# Allegro board P1_Munteanu_Alessia.brd
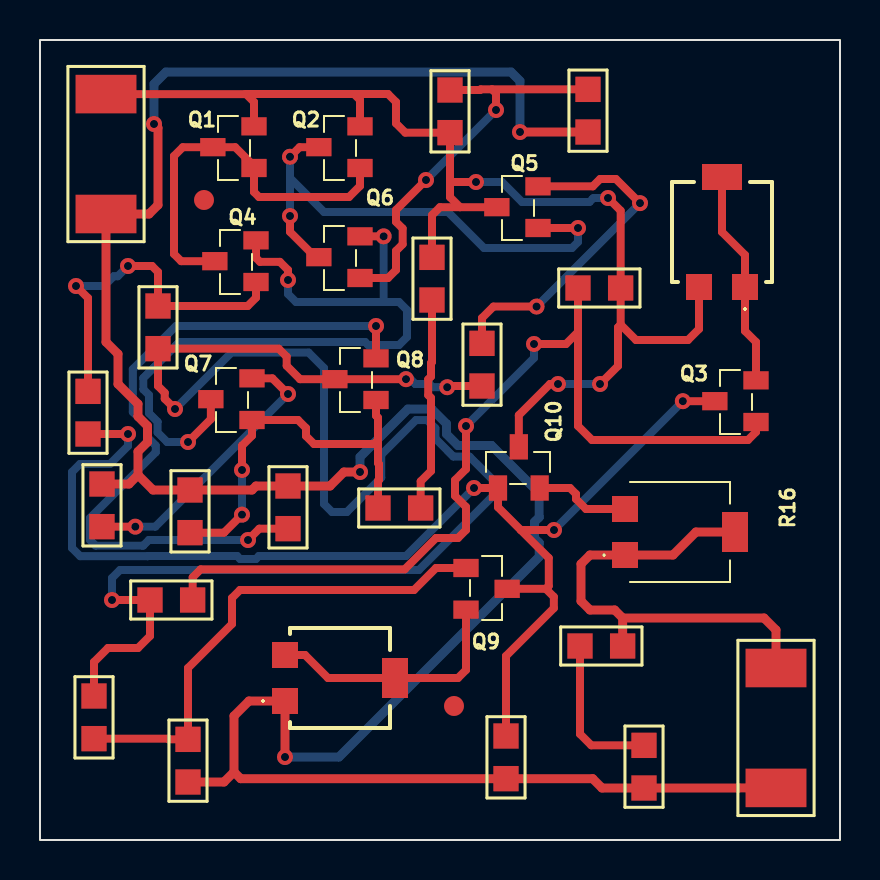
[diagram p0: board, top side]
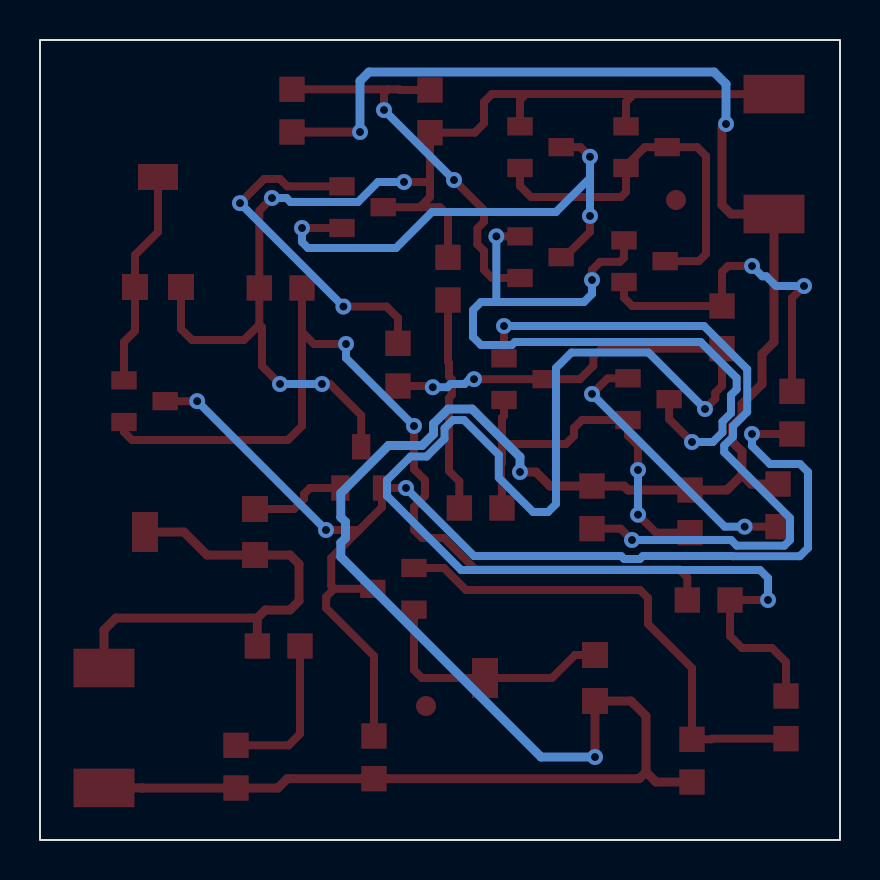
[diagram p1: board, bottom side, seen from below]

Outline 40 x 40 mm; copper layers: TOP, BOTTOM. Coordinates in mm from the lower left corner of the outline.
Outline path: rectangle 0,0 40,40

## Design rules (mm)
nets with their own width: min track width 0.4; nets N10233 N10271 N10283 N10319 N10427 N10509 N10569 N10663 N10703 N10707 N10767 N10953 N10981 N10985 N11935 N12231 N108211 N108411 VCC
nets with their own width: min track width 0.45; nets GND VOUT

## Placement (name value [footprint] x y rotation side)
C2  1n  [SMC0805]  23.3 5.2 270 top
J1  CON2  [SMR2512]  36.8 8.6 270 top
J2  CON2  [SMR2512]  3.3 31.3 90 top
NOREF  -  [unnamed]  8.2 32 0 top
NOREF#2  -  [unnamed]  20.7 6.7 0 top
Q1  PNP BCE  [TO236AA]  10.7 33.6 0 top
Q2  PNP BCE  [TO236AA]  16 33.6 0 top
Q3  PNP BCE  [TO236AA]  35.8 20.9 0 top
Q4  NPN BCE  [TO236AA]  10.8 27.9 0 top
Q5  NPN BCE  [TO236AA]  24.9 30.6 0 top
Q6  NPN BCE  [TO236AA]  16 28.1 0 top
Q7  NPN BCE  [TO236AA]  10.6 21 0 top
Q8  NPN BCE  [TO236AA]  16.8 22 0 top
Q9  NPN BCE  [TO236AA]  21.3 13.6 180 top
Q10  NPN BCE  [TO236AA]  22.9 17.6 270 top
R1  47k  [SMR0805]  5.9 26.7 270 top
R2  68k  [SMR0805]  2.4 20.3 90 top
R3  100  [SMR0805]  3.1 17.8 270 top
R4  15k  [SMR0805]  16.9 16.6 0 top
R5  15k  [SMR0805]  19.6 27 90 top
R6  2k  [SMR0805]  7.5 17.5 270 top
R7  2k  [SMR0805]  20.5 37.5 270 top
R8  2k  [SMR0805]  27.4 35.4 90 top
R9  510  [SMR0805]  22.1 22.7 90 top
R10  1k  [SMR0805]  12.4 17.7 270 top
R11  47k  [SMR0805]  5.5 12 0 top
R12  47k  [SMR0805]  2.7 7.2 270 top
R13  10k  [SMR0805]  26.9 27.6 0 top
R14  10k  [SMR0805]  7.4 2.9 90 top
R15  10k  [SMR0805]  27 9.7 0 top
R16  -  [TS53YL104MR10]  32 15.4 270 top
RSAR  1k  [SMR0805]  30.2 2.6 90 top
VR1  -  [TS53YL202MR10]  34.1 30.4 0 top
VR2  -  [TS53YL202MR10]  15 8.1 270 top

## Library data of the parts
C2 = C
J1 = CON2_1
J2 = CON2_0
Q1 = PNP BCE_0
Q2 = PNP BCE_1
Q3 = PNP BCE_2
Q4-Q10 = NPN BCE_0
R1-R15 RSAR = R
R16 = TS53YL104MR10
VR1 VR2 = TS53YL202MR10

## Footprints (pads in the part's own frame, mm; a bottom-side part is the same pattern mirrored in y, then rotated)
SMC0805
  rect 1.27x1.27 smd: 1(0,0) 2(2.134,0)
SMR0805
  rect 1.27x1.27 smd: 1(0,0) 2(2.134,0)
SMR2512
  rect 1.93x3.048 smd: 1(0,0) 2(5.994,0)
TO236AA
  rect 1.27x0.914 smd: 1(0,0) 2(0,2.083) 3(-2.057,1.041)
TS53YL104MR10
  rect 1.3x1.3 smd: A1(1.15,-2.75) C1(-1.15,-2.75)
  rect 2x1.3 smd: B1(0,2.75)
TS53YL202MR10
  rect 1.3x1.3 smd: A1(1.15,-2.75) C1(-1.15,-2.75)
  rect 2x1.3 smd: B1(0,2.75)
unnamed
  round 1 smd: (0,0)

## Nets
GND: C2.2 J1.2 J2.1 R3.1 R6.1 R8.1 R10.1 R14.1 RSAR.1 VR2.A1
VCC: J2.2 Q1.2(E) Q2.2(E) Q5.3 Q10.3 R5.2 R7.2 R13.2 VR1.C1
VOUT: J1.1 R15.2 R16.A1 R16.B1
N10233: Q3.1 R11.2 R13.1
N10271: Q8.3 R1.2 R9.1 R11.1 R12.1
N10283: C2.1 Q3.3 Q9.3 Q10.1 R2.1
N10319: Q4.1 R1.1 R2.2
N10427: Q9.1 R12.2 R14.2
N10509: Q1.1 Q1.3 Q2.1 Q4.3
N10569: Q2.3 Q5.1 Q6.3
N10663: Q5.2(E) R9.2
N10703: Q6.1 R7.1 R8.2
N10707: Q10.2(E) R16.C1
N10767: Q4.2(E) Q6.2(E) Q7.3
N10953: Q7.1 Q8.1 R4.1 R6.2
N10981: Q7.2(E) R3.2
N10985: Q8.2(E) R10.2
N11935: Q9.2(E) VR2.B1(WIPER) VR2.C1
N12231: Q3.2(E) VR1.A1 VR1.B1(WIPER)
N108211: R15.1 RSAR.2
N108411: R4.2 R5.1

## Via types
v1: diameter 0.8, hole 0.4, TOP to BOTTOM, 36 vias

## Routing (per net, layer and track width the routed paths; a pad name or vN(x,y) marks a point on that pad's centre or on a via; arc(x,y) is an arc through that point)
GND: length 132.9
  TOP w0.45: 9.7,3.4 10.03,3.07 C2.2 27.63,3.07 28.1,2.6 RSAR.1 34.92,2.6 34.92,2.61 J1.2 ; 9.7,3.4 9.7,6.2 10.45,6.95 VR2.A1 v1(12.25,4.15) ; 9.7,3.4 9.2,2.9 R14.1 ; 4.9,18.25 4.45,17.8 R3.1 ; 4.9,18.25 5.65,17.5 R6.1 10.6,17.5 10.8,17.7 R10.1 14.5,17.7 15.2,18.4 v1(16,18.4) ; 4.9,18.25 4.9,19.42 5.38,19.9 5.38,20.7 4.9,21.18 4.9,21.8 3.9,22.8 3.9,24.3 3.3,24.9 J2.1 5.45,31.3 5.9,31.75 5.9,35.6 v1(5.7,35.8) ; v1(24,35.4) R8.1
  BOTTOM w0.45: v1(5.7,35.8) 5.7,37.8 6.3,38.4 23.55,38.4 24,37.95 v1(24,35.4) ; v1(16,18.4) 16,19.15 18.4,21.55 19.59,21.55 20.32,20.81 20.32,20.3 20.9,19.73 22.57,19.73 24.96,17.34 24.96,16.14 24.73,15.9 24.73,15.1 24.96,14.86 24.96,14.16 14.95,4.15 v1(12.25,4.15)
VCC: length 62.8
  TOP w0.4: v1(28,22.8) 28.9,23.7 28.9,25.63 29.03,25.77 ; Q5.3 21,31.64 ; 21,31.64 20.5,32.14 20.5,32.9 ; 21,31.64 20,31.64 19.6,31.24 R5.2 ; 20.5,32.9 R7.2 18.27,35.37 17.8,35.83 17.8,36.9 17.4,37.3 15.7,37.3 ; 20.5,32.9 v1(21.8,32.9) ; 15.7,37.3 16,37 Q2.2 ; 15.7,37.3 10.31,37.3 10.31,37.29 ; v1(25.9,22.8) 25.5,22.8 23.94,21.24 Q10.3 ; 10.31,37.29 10.7,36.9 Q1.2 ; 10.31,37.29 J2.2 ; 29.03,25.77 29.8,25 32.4,25 32.95,25.55 VR1.C1 ; 29.03,25.77 R13.2 29.03,31.47 v1(28.4,32.1)
  BOTTOM w0.4: v1(21.8,32.9) 23.1,32.9 24.1,31.9 27.47,31.9 27.67,32.1 v1(28.4,32.1) ; v1(25.9,22.8) v1(28,22.8)
VOUT: length 23.9
  TOP w0.45: 29.13,11.1 36.2,11.1 36.8,10.5 J1.1 ; 29.13,11.1 R15.2 ; 29.13,11.1 28.73,11.5 27.5,11.5 27.05,11.95 27.05,13.8 27.5,14.25 R16.A1 31.65,14.25 32.8,15.4 R16.B1
N10233: length 46.1
  TOP w0.4: v1(24.7,24.8) 26.3,24.8 26.9,25.4 ; 26.9,25.4 26.9,20.7 27.6,20 35.4,20 35.8,20.4 Q3.1 ; 26.9,25.4 R13.1 ; v1(21.3,20.7) 21.3,18.54 20.75,17.99 20.75,17.21 21.3,16.66 21.3,15.5 20.9,15.1 19.8,15.1 18.23,13.53 8.03,13.53 7.63,13.13 R11.2
  BOTTOM w0.4: v1(21.3,20.7) 24.7,24.1 v1(24.7,24.8)
N10271: length 80.5
  TOP w0.4: v1(3.6,12) R11.1 5.5,10.2 4.9,9.6 3.4,9.6 2.7,8.9 R12.1 ; v1(6.75,21.55) 6.24,22.06 6.24,22.36 5.9,22.7 R1.2 11.93,24.57 12.33,24.17 12.33,23.71 13,23.04 Q8.3 v1(18.3,23.04) ; R9.1 20.42,22.7 v1(20.36,22.64)
  BOTTOM w0.4: v1(18.3,23.04) 18.53,23.04 18.77,22.8 19.47,22.8 19.63,22.64 v1(20.36,22.64) ; v1(3.6,12) 3.6,13.1 4,13.5 18.94,13.5 22.65,17.21 22.65,17.99 21.47,19.17 20.67,19.17 19.77,20.07 19.77,20.58 19.36,21 18.8,21 17.06,19.26 17.06,18.12 15.34,16.4 14.6,16.4 14.2,16.8 14.2,23.6 13.43,24.37 9.57,24.37 v1(6.75,21.55)
N10283: length 61.7
  TOP w0.4: 24.04,15.5 25.44,14.1 25.44,12.7 25.29,12.56 ; 24.04,15.5 v1(25.7,15.5) ; 24.04,15.5 22.9,16.64 Q10.1 v1(21.7,17.6) ; Q9.3 25.29,12.56 ; 25.29,12.56 25.69,12.16 25.69,11.59 23.3,9.2 C2.1 ; v1(4.4,20.3) R2.1 ; Q3.3 v1(32.14,21.94)
  BOTTOM w0.4: v1(21.7,17.6) 18.3,14.2 10.94,14.2 10.79,14.05 10.01,14.05 9.86,14.2 5.39,14.2 5.38,14.19 2.01,14.19 1.6,14.6 1.6,18.4 2,18.8 3.5,18.8 4.4,19.7 v1(4.4,20.3) ; v1(32.14,21.94) v1(25.7,15.5)
N10319: length 17.7
  TOP w0.4: R2.2 2.4,27.1 v1(1.8,27.7) ; Q4.1 10.8,27.12 10.38,26.7 R1.1 5.9,28.4 5.6,28.7 v1(4.4,28.7)
  BOTTOM w0.4: v1(1.8,27.7) 3.2,27.7 3.69,28.19 3.89,28.19 v1(4.4,28.7)
N10427: length 25
  TOP w0.4: Q9.1 19.8,13.6 18.7,12.5 10,12.5 9.6,12.1 9.6,10.8 7.4,8.6 R14.2 6.44,5.03 6.41,5.07 R12.2
N10509: length 19.5
  TOP w0.4: Q4.3 7.06,28.94 6.7,29.3 6.7,34.2 7.14,34.64 Q1.3 9.76,34.64 10.7,33.7 Q1.1 10.7,32.4 10.95,32.15 15.45,32.15 16,32.7 Q2.1
N10569: length 26
  TOP w0.4: Q6.3 13.76,29.14 12.5,30.41 v1(12.5,31.2) ; v1(12.5,34.16) 12.98,34.64 Q2.3 ; Q5.1 v1(26.9,30.6)
  BOTTOM w0.4: 12.5,33.1 14.2,31.4 20.4,31.4 22.2,29.6 26.6,29.6 26.9,29.9 v1(26.9,30.6) ; 12.5,33.1 v1(12.5,31.2) ; 12.5,33.1 v1(12.5,34.16)
N10663: length 17.5
  TOP w0.4: 22.1,24.63 R9.2 22.1,26.1 22.67,26.67 v1(24.83,26.67) ; v1(30,31.84) 28.79,33.05 28.01,33.05 27.64,32.68 Q5.2
  BOTTOM w0.4: v1(30,31.84) v1(24.83,26.67)
N10703: length 20.3
  TOP w0.4: Q6.1 17.4,28.1 17.8,28.5 17.8,29.46 18.13,29.79 18.13,30.58 17.8,30.91 17.8,31.5 v1(19.3,33) ; R7.1 22,37.5 22.04,37.53 22.6,37.53 ; 22.6,37.53 R8.2 ; 22.6,37.53 22.8,37.33 v1(22.8,36.5)
  BOTTOM w0.4: v1(19.3,33) v1(22.8,36.5)
N10707: length 4.8
  TOP w0.4: Q10.2 26.5,17.6 26.8,17.3 26.8,17.05 27.3,16.55 R16.C1
N10767: length 37.5
  TOP w0.4: Q6.2 v1(17.18,30.18) ; Q7.3 8.54,21.04 v1(7.4,19.9) ; v1(12.4,28) 12.4,28.5 11.99,28.91 11,28.91 10.8,29.11 Q4.2
  BOTTOM w0.4: v1(12.4,28) 12.4,27.3 12.8,26.9 17.2,26.9 ; v1(17.18,30.18) 17.18,26.92 17.2,26.9 ; v1(7.4,19.9) 6.36,19.9 5.88,20.38 5.88,20.91 5.45,21.34 5.45,22.25 5.17,22.53 5.17,23.1 6.97,24.9 16.26,24.9 16.41,24.75 17.95,24.75 18.35,25.15 18.35,26.5 17.95,26.9 17.2,26.9
N10953: length 20.5
  TOP w0.4: v1(10.1,18.5) 10.1,19.72 10.6,20.22 Q7.1 12.9,21 13.3,20.6 13.3,20.2 13.7,19.8 16.7,19.8 16.9,20 ; R6.2 9.2,15.37 v1(10.1,16.27) ; R4.1 16.9,17.96 16.95,18.01 16.95,18.79 16.9,18.84 16.9,20 ; Q8.1 16.8,21.22 16.9,21.12 16.9,20
  BOTTOM w0.4: v1(10.1,16.27) v1(10.1,18.5)
N10981: length 14.2
  TOP w0.4: R3.2 v1(4.77,15.67) ; v1(12.4,22.3) 11.62,23.08 Q7.2
  BOTTOM w0.4: v1(12.4,22.3) 5.77,15.67 v1(4.77,15.67)
N10985: length 35.4
  TOP w0.4: v1(10.4,15) 10.97,15.57 R10.2 ; v1(16.8,25.7) Q8.2
  BOTTOM w0.4: v1(16.8,25.7) 6.8,25.7 4.64,23.54 4.64,21.4 5.35,20.69 5.35,20.16 5.79,19.72 5.79,19.39 2.5,16.1 2.5,15 2.78,14.72 5.16,14.72 5.44,15 v1(10.4,15)
N11935: length 12.7
  TOP w0.4: Q9.2 21.3,8.5 20.9,8.1 VR2.B1 14.4,8.1 13.25,9.25 VR2.C1
N12231: length 10.9
  TOP w0.4: Q3.2 35.8,24.9 35.25,25.45 VR1.A1 35.25,29.25 34.1,30.4 VR1.B1
N108211: length 7.8
  TOP w0.4: RSAR.2 27.57,4.73 27,5.3 R15.1
N108411: length 10.8
  TOP w0.4: R5.1 19.6,23.9 19.55,23.85 19.55,23.17 19.41,23.03 19.41,22.25 19.55,22.11 19.55,18.45 19.03,17.93 R4.2

## Text on the board
User.Comments: MUNTEANU
Ref Des/Assembly Top: Munteanu
XSECTION_CHART: *  SURFACE | L1 TOP CONDUCTOR | *  DIELECTRIC | L2 BOTTOM CONDUCTOR | DESIGN CROSS SECTION CHART | ___________________________ | TOTAL THICKNESS 0.26416 MM | 1-2
PLACE_BOUND_TOP: FIGURE | FINISHED_SIZE | 0.4 | DRILL CHART: TOP to BOTTOM | ALL UNITS ARE IN MILLIMETERS | PLATED | QTY | 36
